# Altium PCB Bumblebee.PcbDoc
Units mil, origin at the board's own origin, x right, y up, seen from the top; angles counter-clockwise.
Board outline 3420 x 3410 mil, 2 copper layers (Top Layer, Bottom Layer); 43 components, 29 nets, 185 pads, 25 vias.
Unrouted connection lines stored in the file: 81.
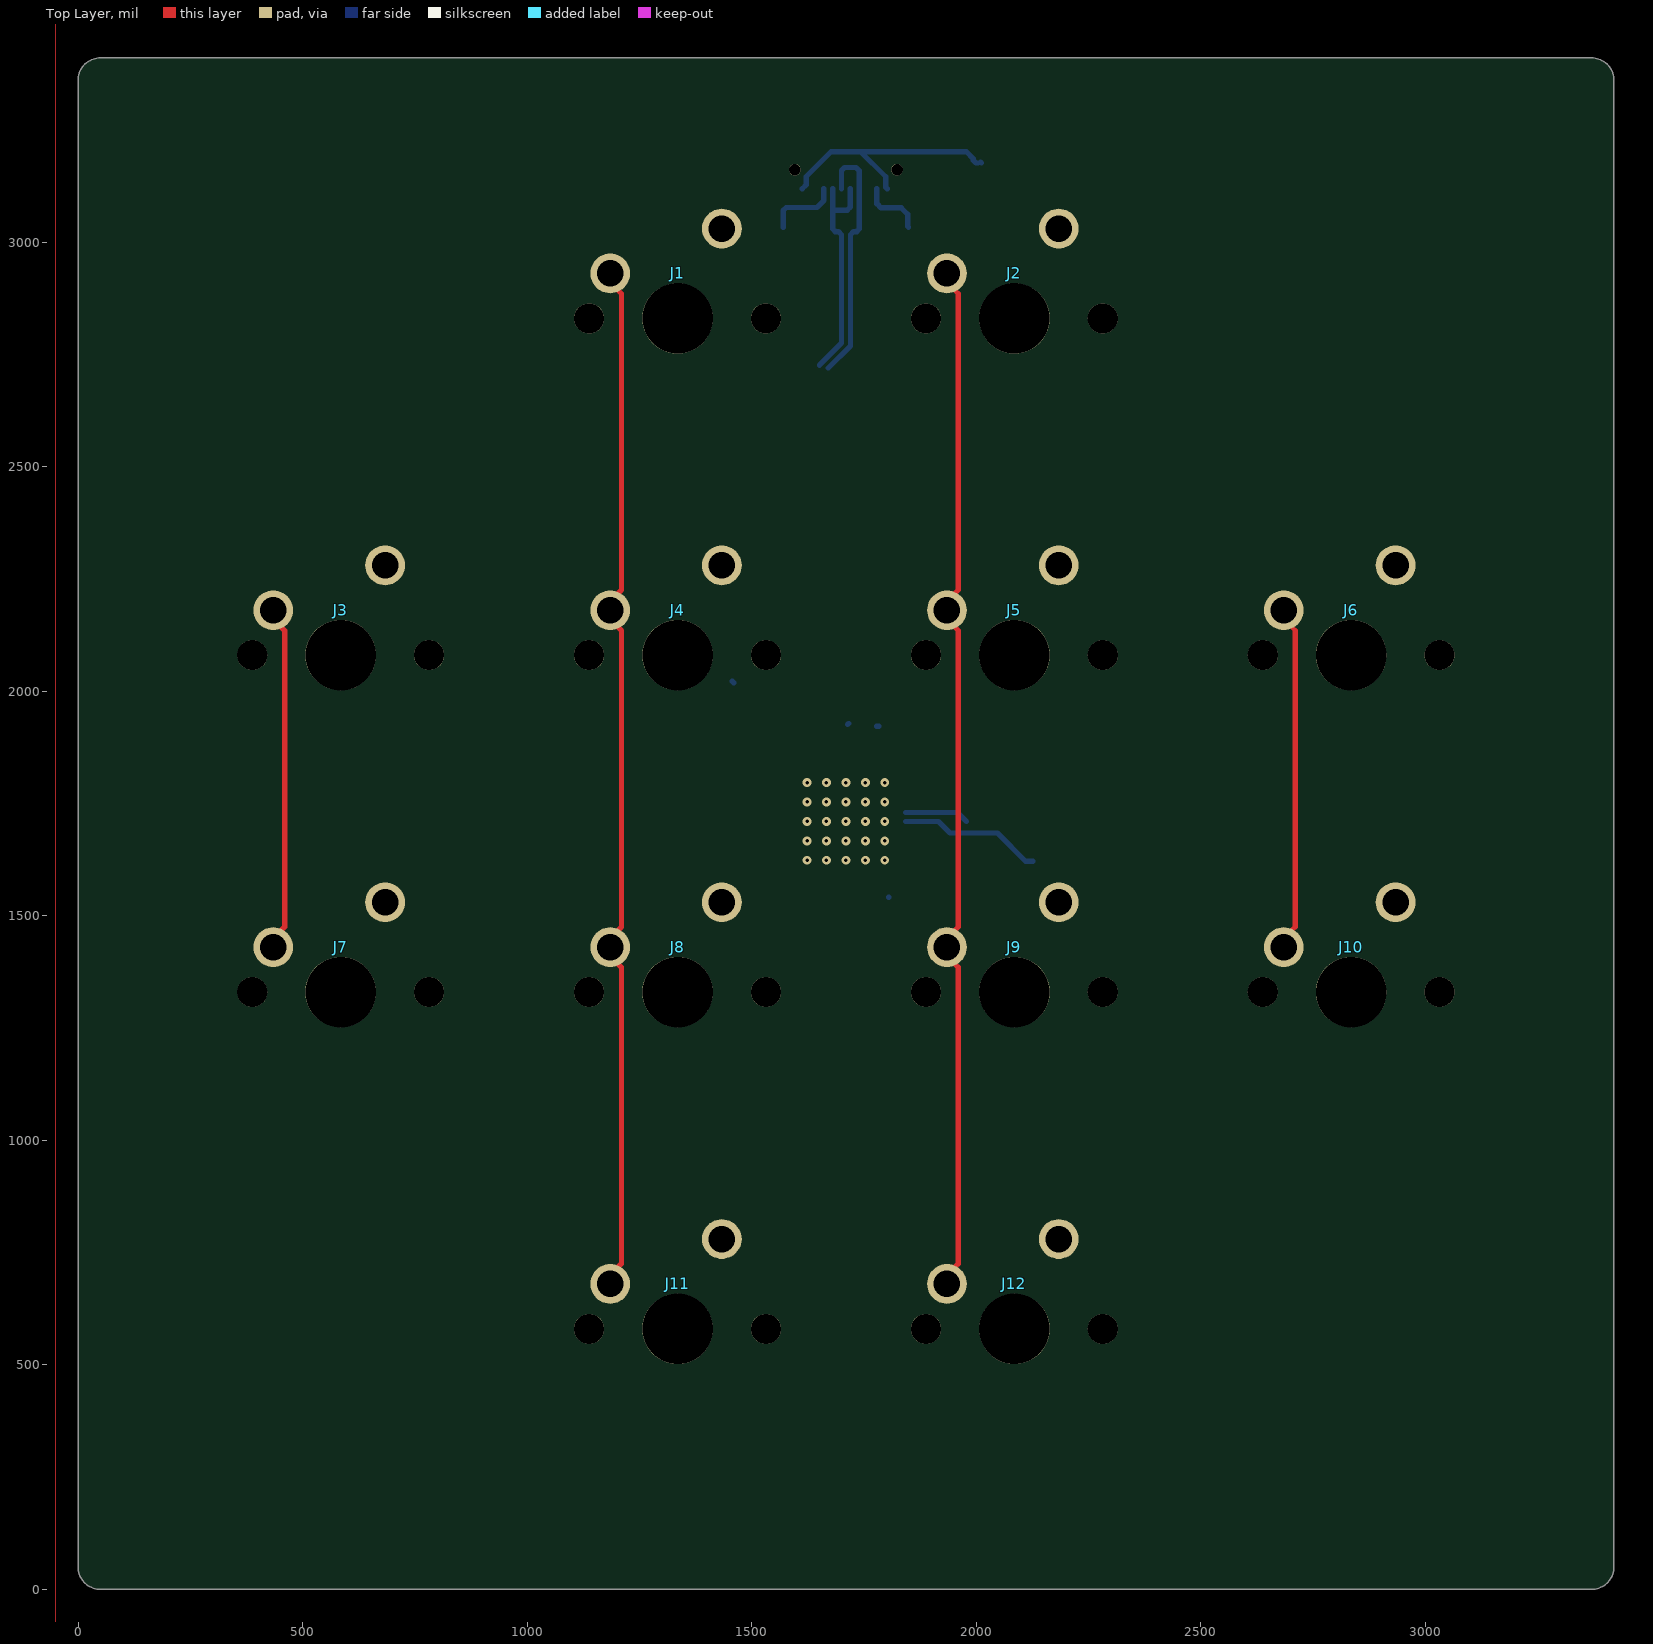
[diagram p0: Top Layer view]
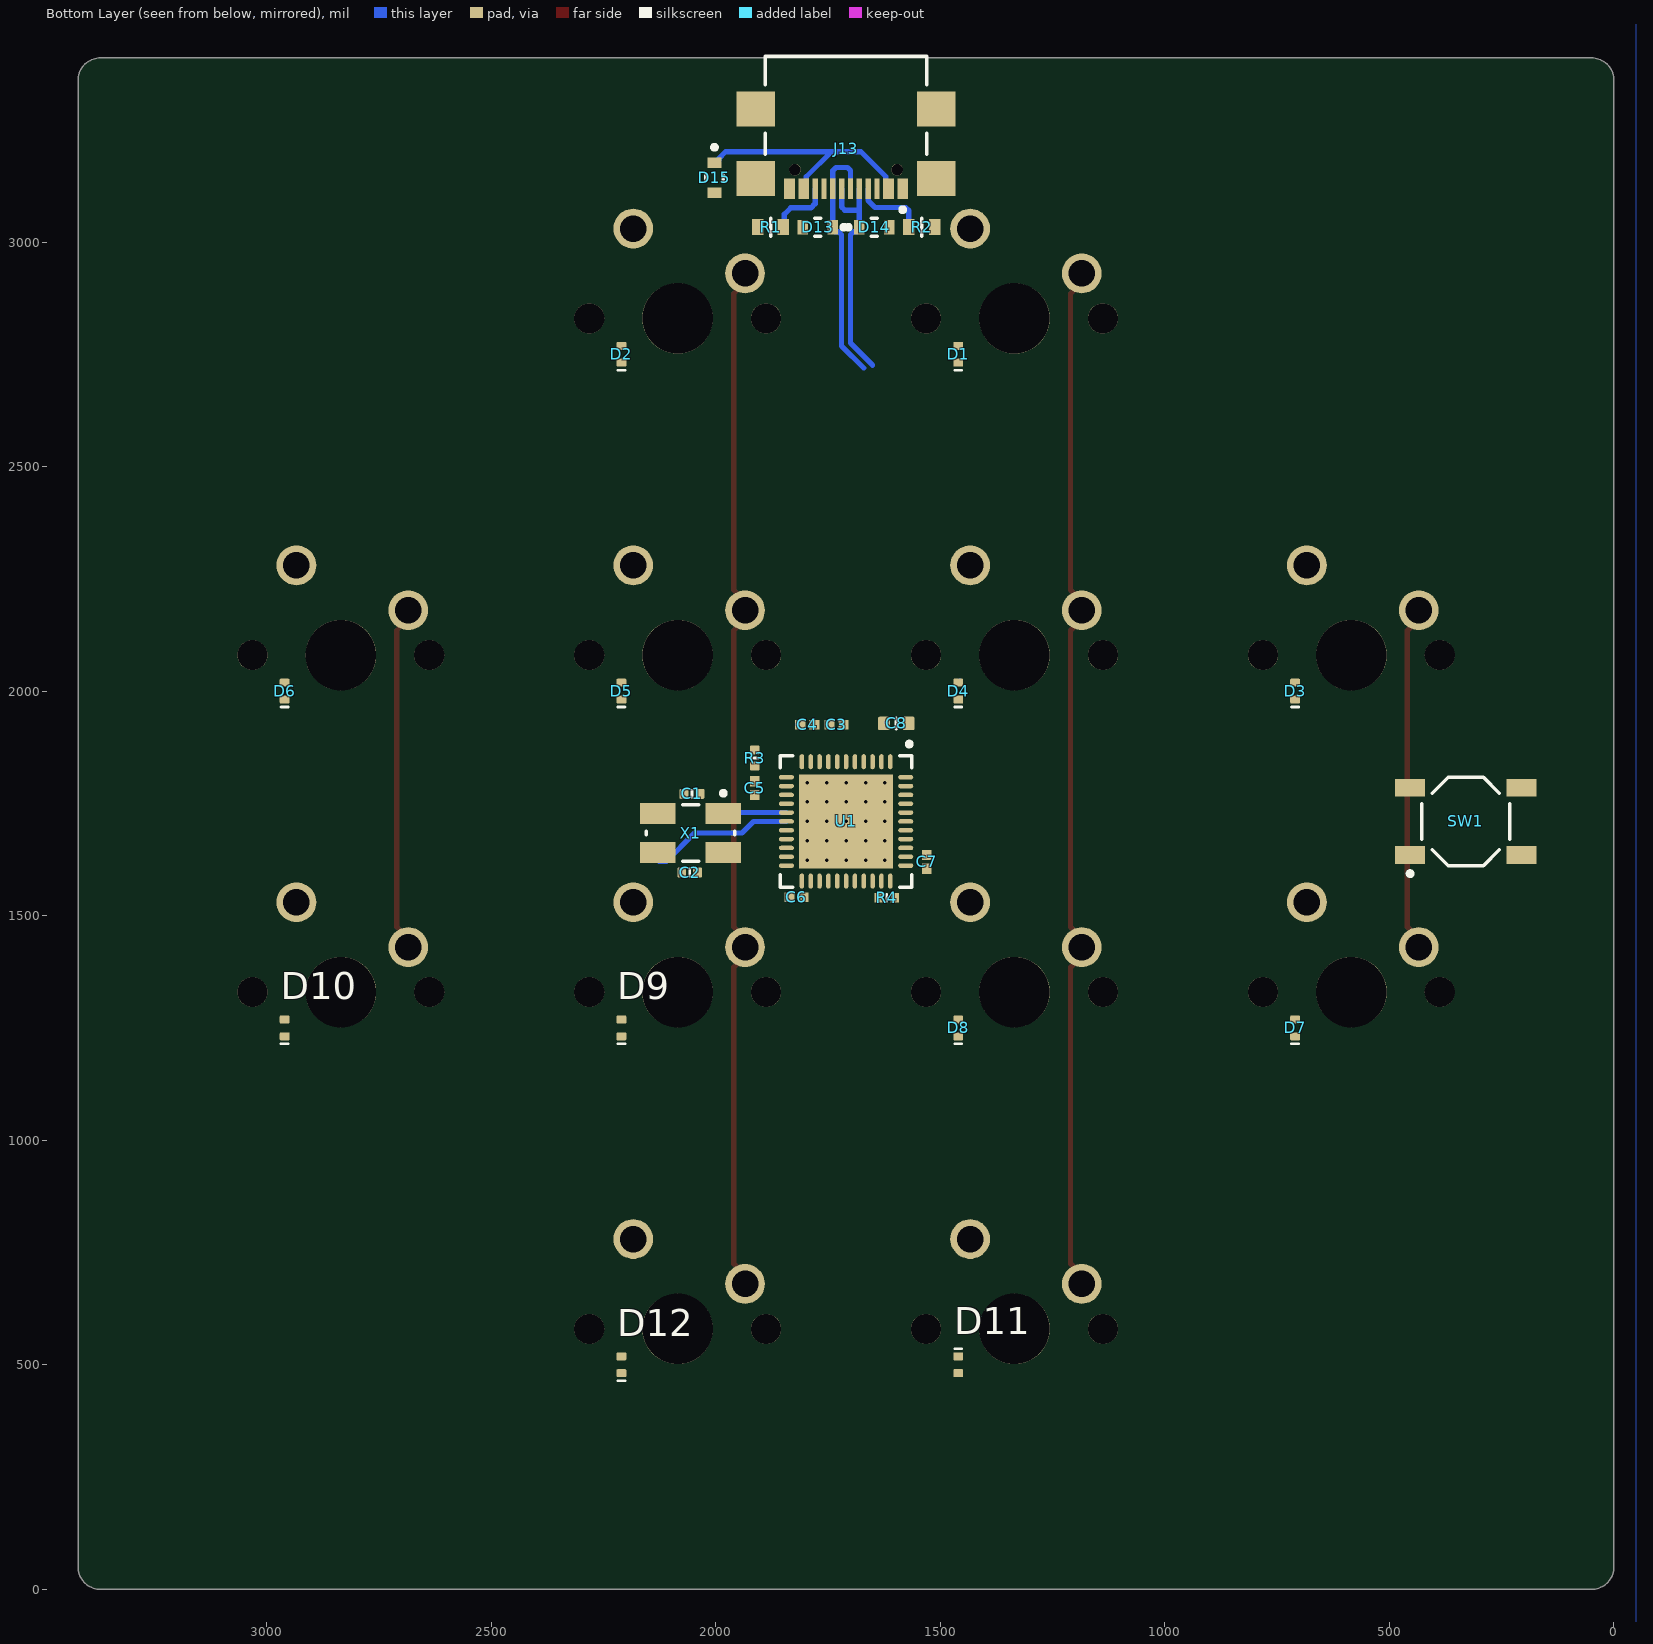
[diagram p1: Bottom Layer view, seen from below]

## Layer stack, top to bottom
Top Solder: solder mask 0.4, Solder Resist, Dk 3.5
Top Layer: signal copper 1.4
Dielectric 1: dielectric 12.6, FR-4, Dk 4.8
Bottom Layer: signal copper 1.4
Bottom Solder: solder mask 0.4, Solder Resist, Dk 3.5

## Board outline
0,50 0,3360 cw(c50,3360) 50,3410 3370,3410 cw(c3370,3360) 3420,3360 3420,50 cw(c3370,50) 3370,0 50,0 cw(c50,50)

## Design rules (kind name [scope] priority, off if disabled: settings)
BoardOutlineClearance [All] p1: gap=7.87 ignorepadtopadclearanceinfootprint=FALSE
Clearance [All] p1: gap=5 ignorepadtopadclearanceinfootprint=FALSE except(9.84: Arc-Hole Track-Hole SMDPad-Hole THPad-Hole Via-Hole Fill-Hole Poly-Hole Region-Hole Text-Hole)
ComponentClearance [All] p1: gap=5 collisioncheckmode=3 verticalgap=5 showdistances=TRUE
DiffPairsRouting [All] p1: maxlimit=10 minlimit=5 mostfreqgap=5 toplayer_minwidth=5 toplayer_maxwidth=1000 toplayer_prefwidth=5 bottomlayer_minwidth=5 bottomlayer_maxwidth=1000 bottomlayer_prefwidth=5 maxuncoupledlength=500
Height [All] p1: minheight=0 maxheight=71497.94 prefheight=500
HoleSize [All] p1: absolutevalues=TRUE maxlimit=248.03 minlimit=11.81 maxpercent=80.000 minpercent=20.000
HoleToHoleClearance [All] p1: gap=9.84 allowstackedmicrovias=FALSE
MinimumAnnularRing [All] p1: minimumring=3
MinimumSolderMaskSliver [All] p1: minsoldermaskwidth=0
PlaneClearance [All] p1: clearance=5
PlaneConnect PlaneConnectPowerPads [InPadClass('PowerPads')] p1: planeconnectstyle=Direct reliefexpansion=20 reliefentries=4 reliefconductorwidth=10 reliefairgap=10
PlaneConnect [All] p2: pad.planeconnectstyle=Relief pad.reliefexpansion=11.81 pad.reliefentries=4 pad.reliefconductorwidth=5 pad.reliefairgap=5 via.planeconnectstyle=Direct via.reliefexpansion=11.81 via.reliefentries=4 via.reliefconductorwidth=5 via.reliefairgap=5
PolygonConnect PolygonConnectPowerPads [All vs (InPadClass('PowerPads'))] p1: connectstyle=Direct reliefconductorwidth=10 reliefentries=4 polygonreliefangle="90 Angle" airgapwidth=10
PolygonConnect [All] p2: thpad.connectstyle=Relief thpad.reliefconductorwidth=5 thpad.reliefentries=4 thpad.polygonreliefangle="90 Angle" thpad.airgapwidth=5 smdpad.connectstyle=Relief smdpad.reliefconductorwidth=5 smdpad.reliefentries=4 smdpad.polygonreliefangle="90 Angle" smdpad.airgapwidth=5 via.connectstyle=Direct via.reliefconductorwidth=5 via.reliefentries=4 via.polygonreliefangle="90 Angle" via.airgapwidth=5
RoutingVias [All] p1: holewidth=11.81 width=23.62 viastyle="Through Hole" minholewidth=11.81 minwidth=23.62 maxholewidth=23.62 maxwidth=259.84
SilkToSilkClearance [All] p1: silktosilkclearance=0
SilkToSolderMaskClearance [IsPad] p1: minsilkscreentomaskgap=5 clearancetoexposedcopper=TRUE
SolderMaskExpansion [All] p1: expansion=2.95 istentingtop=FALSE
Width [All] p1: maxlimit=1000 minlimit=5 preferedwidth=5 minimp=50.000000 maximp=50.000000 favimp=50.000000
20 further rules are at their usual default settings.

## Classes and differential pairs
component class Bumblebee: C1 C2 C3 C4 C5 C6 C7 C8 D2 D3 D4 D5 D6 D10 D13 D15 J1 J2 J4 J6 J8 J11 J12 J13 R1 R2 R3 R4 SW1 U1 X1
differential pair USB: +USB_P -USB_N

## Components (designator, comment, footprint, x,y, rotation, side; value= is the part's Value field where it differs from the comment)
C1 "Capacitor 22pF +/-10% 50V 0402" CAPC0402(1005)60_L 2053,1771 r0 bottom value=22pF
C2 "Capacitor 22pF +/-10% 50V 0402" CAPC0402(1005)60_L 2058,1596 r180 bottom value=22pF
C3 "Capacitor 1 uF +/- 10% 6.3 V 0402" CAPC1005X55X25LL05T10 1731.31,1925 r0 bottom value=1µF
C4 "Capacitor 0.1 uF +/- 5% 16 V 0402" CAPC1005X56X25LL10T15 1796.31,1925 r0 bottom value=100nF
C5 "Capacitor 0.1 uF +/- 5% 16 V 0402" CAPC1005X56X25LL10T15 1913.31,1784 r270 bottom value=100nF
C6 "Capacitor 0.1 uF +/- 5% 16 V 0402" CAPC1005X56X25LL10T15 1820.31,1541 r0 bottom value=100nF
C7 "Capacitor 0.1 uF +/- 5% 16 V 0402" CAPC1005X56X25LL10T15 1530,1620 r90 bottom value=100nF
C8 "Capacitor 4.7µF +/-20% 10V 0603" CAPC0603(1608)100_L 1598,1928 r180 bottom value=4.7µF
D1 "1SS400CSFH" ROHM-VMN2-2_V 1460,2750 r90 bottom
D2 "1SS400CSFH" ROHM-VMN2-2_V 2210,2750 r90 bottom
D3 "1SS400CSFH" ROHM-VMN2-2_V 710,2000 r90 bottom
D4 "1SS400CSFH" ROHM-VMN2-2_V 1460,2000 r90 bottom
D5 "1SS400CSFH" ROHM-VMN2-2_V 2210,2000 r90 bottom
D6 "1SS400CSFH" ROHM-VMN2-2_V 2960,2000 r90 bottom
D7 "1SS400CSFH" ROHM-VMN2-2_V 710,1250 r90 bottom
D8 "1SS400CSFH" ROHM-VMN2-2_V 1460,1250 r90 bottom
D9 "1SS400CSFH" ROHM-VMN2-2_V 2210,1250 r90 bottom
D10 "1SS400CSFH" ROHM-VMN2-2_V 2960,1250 r90 bottom
D11 "1SS400CSFH" ROHM-VMN2-2_V 1460,500 r270 bottom
D12 "1SS400CSFH" ROHM-VMN2-2_V 2210,500 r90 bottom
D13 "CPDU5V0USP-HF" FP-0603-SOD-523F-MFG 1773,3033 r0 bottom
D14 "CPDU5V0USP-HF" FP-0603-SOD-523F-MFG 1647,3033 r180 bottom
D15 "CPDU5V0USP-HF" FP-0603-SOD-523F-MFG 2003,3143 r270 bottom
J1 "MX1A-11NN" CHERRY_MX1A-11NN_SWITCH 1334.85,2830 r0 top
J2 "MX1A-11NN" CHERRY_MX1A-11NN_SWITCH 2084.85,2830 r0 top
J3 "MX1A-11NN" CHERRY_MX1A-11NN_SWITCH 584.85,2080 r0 top
J4 "MX1A-11NN" CHERRY_MX1A-11NN_SWITCH 1334.85,2080 r0 top
J5 "MX1A-11NN" CHERRY_MX1A-11NN_SWITCH 2084.85,2080 r0 top
J6 "MX1A-11NN" CHERRY_MX1A-11NN_SWITCH 2834.85,2080 r0 top
J7 "MX1A-11NN" CHERRY_MX1A-11NN_SWITCH 584.85,1330 r0 top
J8 "MX1A-11NN" CHERRY_MX1A-11NN_SWITCH 1334.85,1330 r0 top
J9 "MX1A-11NN" CHERRY_MX1A-11NN_SWITCH 2084.85,1330 r0 top
J10 "MX1A-11NN" CHERRY_MX1A-11NN_SWITCH 2834.85,1330 r0 top
J11 "MX1A-11NN" CHERRY_MX1A-11NN_SWITCH 1334.85,580 r0 top
J12 "MX1A-11NN" CHERRY_MX1A-11NN_SWITCH 2084.85,580 r0 top
J13 "USB4110-GF-A" FP-USB4110-GF-A-MFG 1709.84,3263.52 r0 bottom
R1 "ERA-3AEB512V" FP-ERA3A-MFG 1878,3033 r0 bottom value=5.1K
R2 "ERA-3AEB512V" FP-ERA3A-MFG 1541.46,3033 r180 bottom value=5.1K
R3 "10KR2F" RESC0402(1005)_L 1913.31,1851 r90 bottom value=10k
R4 "10KR2F" RESC0402(1005)_L 1619.31,1540 r0 bottom value=10k
SW1 "TL3342F160QG" ESWI-TL3342F160QG_V 330,1709.85 r90 bottom
U1 "ATMEGA32U4-MU" 44PW_L 1709.84,1709.85 r270 bottom
X1 "7B-16.000MAAJ-T" TXC-7B-4_V 2056,1684 r0 bottom

## Footprints (in the part's own frame and the unit in brackets; to place one, negate y for a bottom-side part, rotate by r counter-clockwise, add the part's x,y. Pads: shape width x height; smd on the part's side, far side on the other; paste and mask are expansions set on the pad)
44PW_L [mm] "QFN, 44-Leads, Body 7x7mm, Pitch 0.5mm, Thermal Pad 5.3x5.3mm, IPC High Density"
  oval 0.85x0.25 smd: 1(-3.375,2.5) 2(-3.375,2) 3(-3.375,1.5) 4(-3.375,1) 5(-3.375,0.5) 6(-3.375,0) 7(-3.375,-0.5) 8(-3.375,-1) 9(-3.375,-1.5) 10(-3.375,-2) 11(-3.375,-2.5) 23(3.375,-2.5) 24(3.375,-2) 25(3.375,-1.5) 26(3.375,-1) 27(3.375,-0.5) 28(3.375,0) 29(3.375,0.5) 30(3.375,1) 31(3.375,1.5) 32(3.375,2) 33(3.375,2.5)
  oval 0.25x0.85 smd: 12(-2.5,-3.375) 13(-2,-3.375) 14(-1.5,-3.375) 15(-1,-3.375) 16(-0.5,-3.375) 17(0,-3.375) 18(0.5,-3.375) 19(1,-3.375) 20(1.5,-3.375) 21(2,-3.375) 22(2.5,-3.375) 34(2.5,3.375) 35(2,3.375) 36(1.5,3.375) 37(1,3.375) 38(0.5,3.375) 39(0,3.375) 40(-0.5,3.375) 41(-1,3.375) 42(-1.5,3.375) 43(-2,3.375) 44(-2.5,3.375)
  rect 5.3x5.3 smd: 45(0,0)
  silkscreen extent -4.5,-3.73 3.73,3.72, body extent -3.57,-3.57 3.57,3.57, height 0.9
CAPC0402(1005)60_L [mm] "Chip Capacitor, Body 1.0x0.5mm, Height 0.6mm, IPC High Density"
  rrect25% 0.5x0.55 smd: 1(-0.45,0) 2(0.45,0)
  silkscreen extent 0,-0.2 0,0.2, body extent -0.5,-0.25 0.5,0.25, height 0.6
CAPC0603(1608)100_L [mm] "Chip Capacitor, Body 1.6x0.8mm, Height 1.0mm, IPC High Density"
  rrect25% 0.66x0.76 smd: 1(-0.7,0) 2(0.7,0)
  silkscreen extent 0,-0.3 0,0.3, body extent -0.8,-0.4 0.8,0.4, height 0.95
CAPC1005X55X25LL05T10 [mm] "Chip Capacitor, 2-Leads, Body 1.05x0.55mm, IPC High Density"
  rect 0.56x0.52 smd: 1(-0.39,0) 2(0.39,0)
  body extent -0.53,-0.28 0.53,0.28, height 0.55
CAPC1005X56X25LL10T15 [mm] "Chip Capacitor, 2-Leads, Body 1.10x0.60mm, IPC High Density"
  rect 0.58x0.54 smd: 1(-0.39,0) 2(0.39,0)
  body extent -0.55,-0.3 0.55,0.3, height 0.56
CHERRY_MX1A-11NN_SWITCH [mm]
  round 3.988 hole 3.988 unplated: MC(0,0)
  round 1.7 hole 1.7 unplated: ML(-5,0) MR(5,0)
  round 2.25 hole 1.5: P$1(2.51,5.08) P$2(-3.81,2.54)
ESWI-TL3342F160QG_V [mm] "SMD, 4-Leads, Body 5x5mm, Pitch 6.3mm"
  rect 1x1.7 smd: 1(-1.9,3.15) 2(-1.9,-3.15) 3(1.9,3.15) 4(1.9,-3.15)
  silkscreen extent -3.07,-2.5 2.5,3.28, body extent -2.5,-2.5 2.5,2.5, height 1.5
FP-0603-SOD-523F-MFG [mm]
  rect 0.6x0.8 smd paste+0 mask+0: 1(-0.85,0) 2(0.85,0)
  silkscreen extent -1.85,-0.5 0.18,0.5, body extent -0.85,-0.45 0.85,0.45, height 0.85
FP-ERA3A-MFG [mm]
  rect 0.65x0.9 smd paste+0 mask+0: 1(-0.725,0) 2(0.725,0)
  silkscreen extent 0,-0.5 0,0.5, body extent -0.8,-0.4 0.8,0.4, height 0.55
FP-USB4110-GF-A-MFG [mm]
  rect 2.18x2 smd paste+0 mask+0: 1(-5.11,3.105) 2(5.11,3.105) 3(-5.11,-0.825) 4(5.11,-0.825)
  rect 0.6x1.15 smd paste+0 mask+0: A1-B12(-3.2,3.68) A4-B9(-2.4,3.68) B1-A12(3.2,3.68) B4-A9(2.4,3.68)
  rect 0.3x1.15 smd paste+0 mask+0: A5(-1.25,3.68) A6(-0.25,3.68) A7(0.25,3.68) A8(1.25,3.68) B5(1.75,3.68) B6(0.75,3.68) B7(-0.75,3.68) B8(-1.75,3.68)
  round 0.65 hole 0.65 unplated paste-1000 mask+0: M1(-2.89,2.605) M2(2.89,2.605)
  silkscreen extent -4.57,-3.83 4.57,4.99, body extent -5.65,-3.67 5.65,4.01, height 3.21
RESC0402(1005)_L [mm] "Chip Resistor, Body 1.0x0.5mm, IPC High Density"
  rrect25% 0.5x0.55 smd: 1(-0.45,0) 2(0.45,0)
  silkscreen extent 0,-0.2 0,0.2, body extent -0.5,-0.25 0.5,0.25, height 0.3
ROHM-VMN2-2_V [mm] "VMN2, 2-Leads, Body 0.9x0.6mm, Pitch 0.95mm"
  rrect25% 0.45x0.55 smd: 1(-0.475,0) 2(0.475,0)
  silkscreen extent -0.9,-0.2 -0.9,0.2, body extent -0.5,-0.3 0.5,0.3, height 0.37
TXC-7B-4_V [mm] "SMD, 4-Leads, Body 5x3.2mm, Pitch 3.7mm"
  rect 2x1.2 smd: 1(-1.85,-1.1) 2(1.85,-1.1) 3(1.85,1.1) 4(-1.85,1.1)
  silkscreen extent -2.5,-2.37 2.5,1.6, body extent -2.5,-1.6 2.5,1.6, height 1.05

## Part data
C1 C2: library part CMP-001-00073-3, "Chip Capacitor, 22pF +/-10%, 50V, 0402, Thickness 0.6 mm", Case/Package=0402, Max Operating Temperature=85°C, Min Operating Temperature=-55°C, Tolerance=10%, Voltage Rating=50V, Mounting Technology=SMT, Pins=2
C3: library part CMP-001-00008-6, "Chip Capacitor, 1 uF, +/- 10%, 6.3 V, 0402 (1005 Metric)", Capacitor Type=Ceramic, Case/Package=0402, Max Operating Temperature=85°C, Min Operating Temperature=-55°C, Tolerance=10%, Voltage Rating=6.3V, Mounting Technology=SM, Pins=2, RoHS Compliant=True
C4 C5 C6 C7: library part CMP-001-00001-6, "Chip Capacitor, 0.1 uF, +/- 5%, 16 V, 0402 (1005 Metric)", Capacitor Type=Ceramic, Case/Package=0402, Max Operating Temperature=125°C, Min Operating Temperature=-55°C, Tolerance=5%, Voltage Rating=16V, Mounting Technology=SM, Pins=2, RoHS Compliant=True
C8: library part CMP-001-00076-4, "Chip Capacitor, 4.7µF +/-20%, 10V, 0603, Thickness 1 mm", Case/Package=0603, Max Operating Temperature=85°C, Min Operating Temperature=-55°C, Tolerance=10%, Voltage Rating=10V, Mounting Technology=SMT, Pins=2
D1 D2 D3 D4 D5 D6 D7 D8 D9 D10 D11 D12: library part CMP-004-00022-3, "Switching Diode (High Speed Switching), 80 V, 100 mA, 2-Pin SOD-923, RoHS, Tape and Reel", Mounting Technology=SMT, Pins=2
D13 D14 D15: library part CMP-004-00031-1, "Tvs Diode 5V 25V 0603/SOD523F"
J1 J2 J3 J4 J5 J6 J7 J8 J9 J10 J11 J12: library part CMP-003-000001-3, "Pushbutton Switch SPST-NO Keyswitch Panel Mount, Front", Package=None, Component Type=Standard, Design Item ID=MX1A-11NN, MF=Cherry, MP=MX1A-11NN, Pin Count=2
J13: library part CMP-002-00073-4, "Conn USB Type C RCP 16 POS 0.3mm/0.5mm Solder ST SMD 16 Terminal 1 Port T/R"
R1 R2: library part CMP-009-00177-1, "Res Thin Film 0603 5.1K Ohm 0.1% 1/10W ±25ppm/°C Molded SMD SMD Punched Carrier T/R"
R3 R4: library part CMP-009-00066-2, "10K 0.063W 1% 0402 (1005 Metric)  SMD", Case/Package=0402, Power=63mW, Tolerance=1%, Mounting Technology=SMT, Pins=2
SW1: library part CMP-011-00008-2, "Tactile Switch, SPST-NO, 50 mA, 12 V, 4-Pin SMD, RoHS, Tape and Reel", Current Rating=50mA, Manufacturer=E-Switch, Max Voltage Rating (DC)=12V, Operating Force=1.6N, Package Description="4-Pin Surface Mount Device, Body 5 x 5 mm, Pitch 6.3 mm", Package Quantity=3000, Case/Package=TL3342F160QG, Contact Material=Silver, Contact Plating=Silver, Datasheet URL=http://spec_sheets.e-switch.com/specs/P010632.pdf, Datasheet Version="Rev. I, 12/2010", Manufacturer URL=http://www.e-switch.ch/en/, Mounting Technology=SM, Package Reference=TL3342F160QG, Packaging=TapeandReel, RoHS Compliant=True, Throw Configuration=SPST, Voltage Rating (DC)=12V
U1: library part CMP-020-00023-1, "8-bit AVR MCU, 32 KB, 2560 Bytes, 16 MHz, 2.7 to 5.5V, VQFN-44, RoHS", Number of UART Channels=1, Pins=44
X1: library part CMP-003-00009-2, "SMD Seam Sealing Crystal, 16 MHz, +/- 30 ppm, 18 pF, -10 to 70 degC, 4-Pin SMD, RoHS, Tape and Reel", Case/Package=7B-4, Frequency=16MHz, Frequency Tolerance=30ppm, Load Capacitance=18pF, Manufacturer=TXC, Max Operating Temperature=70°C, Min Operating Temperature=-10°C, Package Description="4-Pin Surface Mount Device, Body 5 x 3.2 mm, Pitch 3.7 mm", Package Quantity=1000, Resistance=40Ohm, Datasheet URL=http://www.txccorp.com/download/products/quartz_crystals/2015TXC_7B_19.pdf, Datasheet Version=Jul-15, ESR=40, Mounting Technology=SM, Package Reference=7B-4, Packaging=TapeandReel, Pins=4, RoHS Compliant=True, Tolerance=30ppm

## Via types
v1: diameter 19.68, hole 7.87, Top Layer to Bottom Layer, 25 vias

## Nets (pads, with @x,y where several pads share a name; then routed paths per layer and width w, separated by ;. In a path a pad name is that pad's centre, name@x,y a point inside that pad or via, vN(x,y) a via of type N, cw(c..) or ccw(c..) an arc to the next point about the centre after c; other vN are vias at no path point)
COL0: J3.P$2 J7.P$2 U1.10 | length 770.8
  Top Layer w11.81: J7.P$2 434.85,1450 460,1475.15 460,2134.85 434.85,2160 J3.P$2
COL1: J1.P$2 J4.P$2 J8.P$2 J11.P$2 U1.11 | length 2312.5
  Top Layer w11.81: J11.P$2 1184.85,700 1210,725.15 1210,1384.85 1184.85,1410 1184.85,1450 1210,1475.15 1210,2134.85 1184.85,2160 1184.85,2200 1210,2225.15 1210,2884.85 1184.85,2910 J1.P$2
COL2: J2.P$2 J5.P$2 J9.P$2 J12.P$2 U1.28 | length 2312.5
  Top Layer w11.81: J12.P$2 1934.85,700 1960,725.15 1960,1384.85 1934.85,1410 1934.85,1450 1960,1475.15 1960,2134.85 1934.85,2160 J5.P$2 1934.85,2200.16 1960,2225.3 1960,2884.7 1934.85,2909.84 J2.P$2
COL3: D1.1 D2.1 D11.1 D12.1 J6.P$2 J10.P$2 U1.8 U1.26 U1.29 | length 770.8
  Top Layer w10: J10.P$2 2684.85,1450 2710,1475.15 ; J6.P$2 2684.85,2160 2710,2134.85
  Top Layer w11.81: 2710,1475.15 2710,2134.85
GND: C1.2 C2.2 C3.2 C4.2 C5.2 C6.2 C7.2 C8.2 D13.2 D14.2 D15.2 J13.1 J13.2 J13.3 J13.4 J13.A1-B12 J13.B1-A12 R1.2 R2.2 R4.1 SW1.1 SW1.2 U1.5 U1.15 U1.23 U1.35 U1.43 X1.2 X1.4
NetC1_1: C1.1 U1.16 X1.1 | length 143.6
  Bottom Layer w11.81: U1.16 1958.39,1729.53 X1.1@1978.15,1709.78
NetC2_1: C2.1 U1.17 X1.3 | length 320.1
  Bottom Layer w11.81: U1.17 1916.15,1709.85 1942,1684 2047.23,1684 2110.23,1621 X1.3@2125.98,1621
NetC3_1: C3.1 U1.6 | length 3.6
  Bottom Layer w11.81: C3.1@1713.43,1925.48 C3.1@1715.95,1928
NetD1_2: D1.2 J1.P$1
NetD2_2: D2.2 J2.P$1
NetD3_2: D3.2 J3.P$1
NetD4_2: D4.2 J4.P$1 | length 4.4
  Bottom Layer w11.81: D4.2@1456.82,2021.65 1459.77,2018.7 D4.2
NetD5_2: D5.2 J5.P$1
NetD6_2: D6.2 J6.P$1
NetD7_2: D7.2 J7.P$1
NetD8_2: D8.2 J8.P$1
NetD9_2: D9.2 J9.P$1
NetD10_2: D10.2 J10.P$1
NetD11_2: D11.2 J11.P$1
NetD12_2: D12.2 J12.P$1
NetJ13_A5: J13.A5 R2.1 | length 163.1
  Bottom Layer w11.81: R2.1 1570,3070.08 1576.92,3077 1645,3077 1660.63,3092.63 J13.A5
NetJ13_B5: J13.B5 R1.1 | length 141
  Bottom Layer w11.81: J13.B5 1778.74,3085.47 1788.21,3076 1833,3076 1847.49,3061.51 1847.49,3034.51 R1.1@1849,3033
NetR3_1: R3.1 SW1.3 SW1.4 U1.13
NetR4_2: R4.2 U1.33
ROW1: D3.1 D4.1 D5.1 D6.1 U1.9
ROW2: D7.1 D8.1 D9.1 D10.1 U1.27
USB_N: D14.1 J13.A7 J13.B7 U1.3 | length 506.6
  Bottom Layer w11.81: 1650.79,2725.79 1700.16,2775.16 1700.16,3016.24 1693.24,3023.16 1686.37,3023.16 1680.46,3029.06 D14.1 ; D14.1@1680.31,3034.85 1680.31,3071 ; J13.B7 1680.31,3071 ; J13.A7 1719.69,3077.92 1712.77,3071 1680.31,3071
USB_P: D13.1 J13.A6 J13.B6 U1.4 | length 557.6
  Bottom Layer w11.81: 1670.47,2719.47 1719.84,2768.84 1719.84,3016.24 1726.76,3023.16 1733.63,3023.16 1739.54,3029.06 D13.1 ; J13.A6 1700,3159.08 1706.92,3166 1732.45,3166 1739.37,3159.08 J13.B6 D13.1@1739.37,3033.17
VBUS: C4.1 C5.1 C6.1 C7.1 C8.1 D15.1 J13.A4-B9 J13.B4-A9 R3.2 U1.2 U1.7 U1.14 U1.24 U1.34 U1.42 U1.44 U1.45 | length 563.4
  Bottom Layer w5: C4.1 C4.1@1781.31,1925.35
  Bottom Layer w11.81: J13.A4-B9@1612.69,3118.64 1621.26,3127.2 1621.26,3145.26 1677,3201 1742.69,3201 ; C4.1@1777.99,1922.04 C4.1@1782.82,1922.04 ; J13.B4-A9@1801.67,3118.64 1798.43,3121.88 1798.43,3145.26 1742.69,3201 ; C6.1 C6.1@1805.17,1540.79 ; D15.1@2003.26,3175.74 1999.79,3175.74 1993.16,3182.37 1993.16,3185.84 1978,3201 1742.69,3201 ; D15.1@2009.26,3178 D15.1@2011.53,3175.73
  other v1: 1623.23,1623.24 1666.53,1623.24 1709.84,1623.24 1753.15,1623.24 1796.46,1623.24 1623.23,1666.54 1666.53,1666.54 1709.84,1666.54 1753.15,1666.54 1796.46,1666.54 1623.23,1709.85 1666.53,1709.85 1709.84,1709.85 1753.15,1709.85 1796.46,1709.85 1623.23,1753.16 1666.53,1753.16 1709.84,1753.16 1753.15,1753.16 1796.46,1753.16 1623.23,1796.46 1666.53,1796.46 1709.84,1796.46 1753.15,1796.46 1796.46,1796.46
pads on no net: J1.MC J1.ML J1.MR J2.MC J2.ML J2.MR J3.MC J3.ML J3.MR J4.MC J4.ML J4.MR J5.MC J5.ML J5.MR J6.MC J6.ML J6.MR J7.MC J7.ML J7.MR J8.MC J8.ML J8.MR J9.MC J9.ML J9.MR J10.MC J10.ML J10.MR J11.MC J11.ML J11.MR J12.MC J12.ML J12.MR J13.A8 J13.B8 J13.M1 J13.M2 U1.1 U1.12 U1.18 U1.19 U1.20 U1.21 U1.22 U1.25 U1.30 U1.31 U1.32 U1.36 U1.37 U1.38 U1.39 U1.40 U1.41

## Polygon pours and split planes (outlines as drawn)
no net on Top Layer "NONET_L01_P001" (solid, shelved, pour order 1): -50,3500 3500,3500 3500,-100 3450,-150 -50,-150
no net on Bottom Layer "NONET_L02_P000" (solid, shelved, pour order 0): -50,3500 3500,3500 3500,-150 -50,-150

## Silkscreen, mask and mechanical layers (free items; w line width, h text height)
Mechanical 1:
  lines w20: 0,50 ccw(c50,50) 50,0 3370,0 ccw(c3370,50) 3420,50 3420,3360 ccw(c3370,3360) 3370,3410 2084.85,3410 50,3410 ccw(c50,3360) 0,3360 0,50